# EAGLE board 1port (EAGLE 7.6.0)
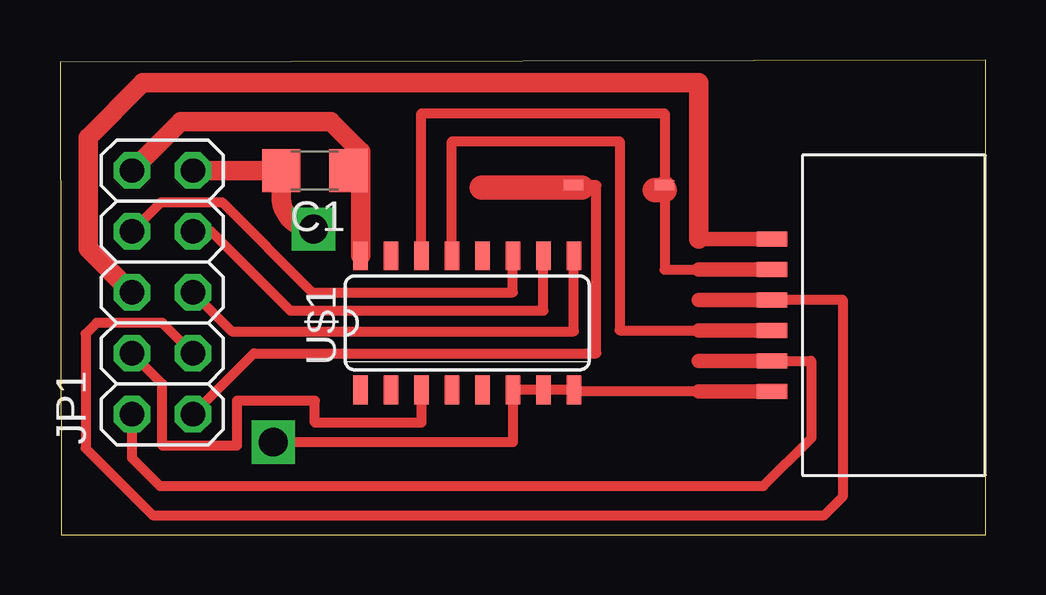
[diagram p0: board, top side]
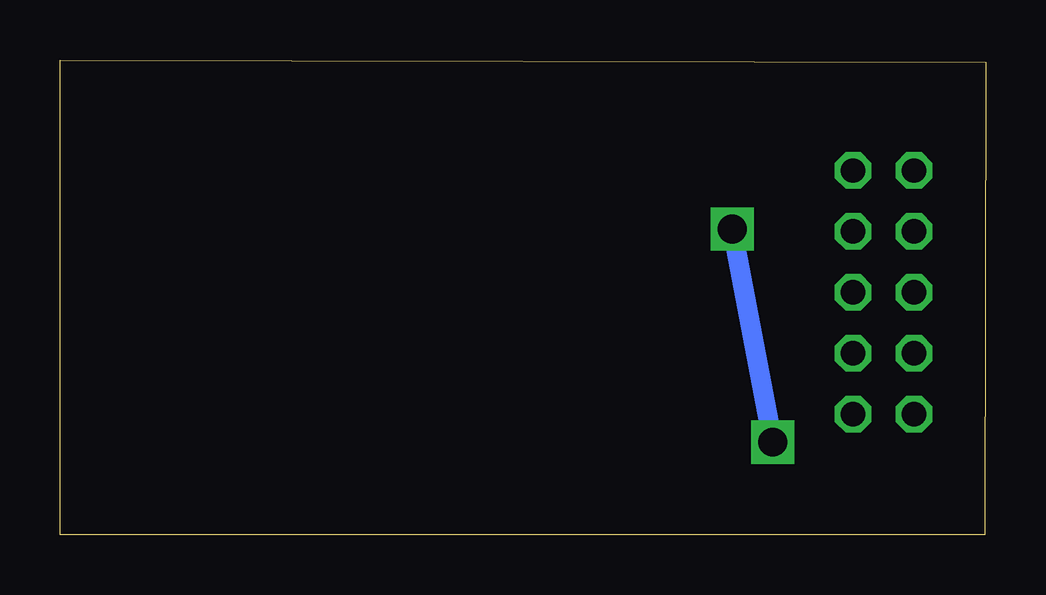
[diagram p1: board, bottom side, seen from below]

Size 38.58 x 19.8 mm. Coordinates in mm from the lower left corner, seen from the top.
Outline: 0.05,0 38.58,0 38.58,19.8 0,19.7 0.05,0
Copper layers (1*16): Top 0.035mm / dielectric 1.5mm / Bottom 0.035mm
Design rules "default": minimum track width 10mil, minimum drill 24mil, track to track 8mil, track to pad 8mil, pad to pad 8mil, via to via 8mil, smd to smd 8mil, copper to edge 40mil, drill to drill 8mil, minimum pad ring 10mil, minimum via ring 8mil, stop-mask expansion 4mil, vias tented up to drill 0mil, thermal gap 10mil

## Footprints (pad centres in the part's own frame; a part is rotated, then mirrored left to right if it is on the bottom)
C1206 = smd 1.6 x 1.8: 1 -1.4,0; 2 1.4,0
2X05 = drill 1.016 octagon: 1 -5.08,-1.27; 2 -5.08,1.27; 3 -2.54,-1.27; 4 -2.54,1.27; 5 0,-1.27; 6 0,1.27; 7 2.54,-1.27; 8 2.54,1.27; 9 5.08,-1.27; 10 5.08,1.27
SO16 = smd 0.6 x 1.2: 1 -4.445,-2.8; 2 -3.175,-2.8; 3 -1.905,-2.8; 4 -0.635,-2.8; 5 0.635,-2.8; 6 1.905,-2.8; 7 3.175,-2.8; 8 4.445,-2.8; 9 4.445,2.8; 10 3.175,2.8; 11 1.905,2.8; 12 0.635,2.8; 13 -0.635,2.8; 14 -1.905,2.8; 15 -3.175,2.8; 16 -4.445,2.8
RJ12_SMD = smd 0.635 x 1.27: DATA 0.953,5.08; GND -2.857,5.08; INT 2.223,5.08; NSS -1.587,5.08; SCK -0.318,5.08; VCC 3.493,5.08
DIL_DIODE_SMD = smd 0.406 x 0.813: 1 0,2.54; 2 0,-1.27

## Placement (x,y rotation side)
C1  [C1206]  10.62,15.19 180 top
JP1  [2X05]  4.27,10.11 90 top
U$1  74HC4051_MUX  [SO16]  16.97,8.84 0 top
U$4  RJ12SMD  [RJ12_SMD]  34.75,8.84 90 top
U$9  DIODE  [DIL_DIODE_SMD]  23.93,14.58 90 top

## Library data of the parts
C1 = resistor
JP1 = pinhead
U$1 = SparkFun-AnalogIC
U$4 U$9 = gumyns

## Nets
3.3V: C1.1 JP1.10 U$1.16
12V: JP1.6 U$4.VCC
A: JP1.8 U$1.11
B: JP1.7 U$1.10
C: JP1.5 U$1.9
DATA: JP1.3 U$4.DATA
GND: C1.2 JP1.9 U$1.6 U$1.7 U$1.8 U$4.GND
INT: JP1.1 U$9.1
INT0: U$1.14 U$4.INT U$9.2
NSS: JP1.2 U$4.NSS
SCK: JP1.4 U$1.3
SCK0: U$1.13 U$4.SCK

## Tracks (layer width: path | path; a pad name or v marks a point on that pad's centre or on a via)
3.3V
  Top 0.813: JP1.10 5.03,17.22 11.28,17.22 12.52,15.98 12.52,15.24 | 12.52,15.24 U$1.16 | C1.1 12.07,15.24 12.52,15.24
12V
  Top 0.813: JP1.6 1.17,11.94 1.17,16.56 3.45,18.85 26.62,18.85 26.62,12.33
A
  Top 0.406: JP1.8 4.22,13.87 6.76,13.87 10.52,10.11 18.87,10.11 U$1.11
B
  Top 0.406: JP1.7 6.3,12.65 9.6,9.35 20.14,9.35 U$1.10
C
  Top 0.406: JP1.5 7.16,8.48 21.41,8.48 U$1.9
DATA
  Top 0.406: 26.62,9.79 arc-90 26.63,9.8 32.61,9.8 32.61,1.58 31.85,0.81 3.86,0.81 1.07,3.61 1.07,8.38 1.52,8.84 4.27,8.84 JP1.3
GND  (via drill 1.2 pad 1.68)
  Top 0.406: 26.62,5.98 21.41,5.98 U$1.8 U$1.7 U$1.6 18.87,3.86 v8.89,3.86
  Top 0.813: JP1.9 C1.2 9.22,14.1 arc90 v10.57,12.75
  Bottom 0.813: v8.89,3.86 v10.57,12.75
INT
  Top 0.406: JP1.1 8.08,7.57 22.35,7.57 22.35,14.58 U$9.1
INT0
  Top 0.406: U$1.14 15.06,17.58 25.2,17.58 U$9.2 | 25.2,14.28 25.2,11.06 26.62,11.06
  Top 0.813: U$9.2 25.2,14.38 25.2,14.28
  Top 1.016: 25.2,14.38 24.79,14.38
N$1
  Top 1.016: 21.74,14.48 17.58,14.48
NSS
  Top 0.406: 26.62,7.25 31.29,7.25 31.29,4.01 29.31,2.03 4.17,2.03 3,3.2 JP1.2
SCK
  Top 0.406: JP1.4 4.27,6.3 4.27,3.71 7.37,3.71 7.37,5.59 10.62,5.59 10.62,4.67 15.06,4.67 U$1.3
SCK0
  Top 0.406: U$1.13 16.33,16.41 23.32,16.41 23.32,8.52 26.62,8.52